# Altium PCB 606-100857-r03.pcbdoc
Units mm, origin at the board's own origin, x right, y up, seen from the top; angles counter-clockwise.
Board outline 10 x 6 mm, 2 copper layers (Top Layer, Bottom Layer), stack 0.771 mm thick; 20 components, 10 nets, 51 pads, 13 vias.
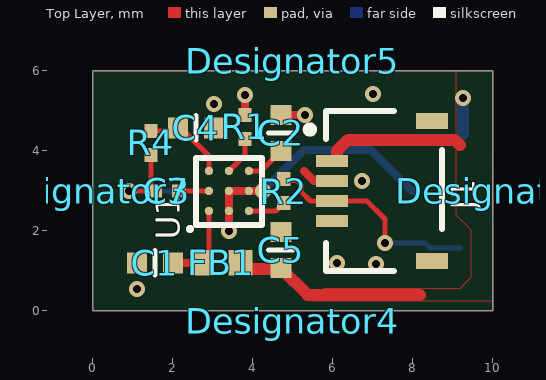
[diagram p0: Top Layer view]
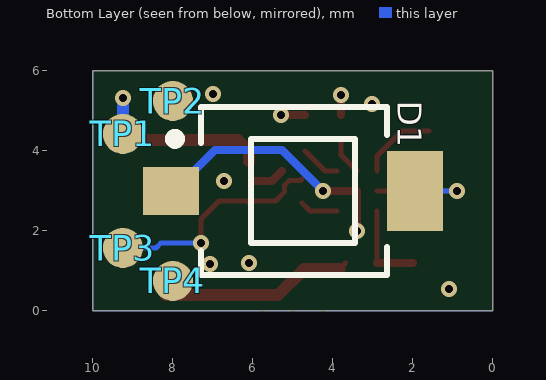
[diagram p1: Bottom Layer view, seen from below]

## Layer stack, top to bottom
Top Solder: solder mask 0.0102, Solder Resist, Dk 3.5
Top Layer: signal copper 0.0356
Dielectric 1: core 0.7, FR-4, Dk 4.2
Bottom Layer: signal copper 0.0356
Bottom Solder: solder mask 0.0102, Solder Resist, Dk 3.5

## Board outline
10,0 10,6 0,6 0,0

## Design rules (kind name [scope] priority, off if disabled: settings)
AssemblyTestPointUsage [All] p0: scope1count=1 scope1_0_kind=Board scope1_0_value=Board scope2count=1 scope2_0_kind=Board scope2_0_value=Board commentlength=0
AssemblyTestpoint [All] p0: scope1count=1 scope1_0_kind=Board scope1_0_value=Board scope2count=1 scope2_0_kind=Board scope2_0_value=Board commentlength=0
BoardOutlineClearance [All] p0: scope1count=1 scope1_0_kind=Board scope1_0_value=Board scope2count=1 scope2_0_kind=Board scope2_0_value=Board commentlength=0 gap=0.25
BoardOutlineClearance BoardOutlineClearance_1 [All] p0: scope1count=1 scope1_0_kind=Component scope1_0_value=j1 scope2count=1 scope2_0_kind=Board scope2_0_value=Board commentlength=0 gap=0
BoardOutlineClearance BoardOutlineClearance_2 [All] p0: scope1count=1 scope1_0_kind=Footprint scope1_0_value=watchman_mousebites scope2count=1 scope2_0_kind=Board scope2_0_value=Board commentlength=0 gap=0
BoardOutlineClearance BoardOutlineClearance_1 [InComponent('j1')] p1: gap=0
BoardOutlineClearance BoardOutlineClearance_2 [HasFootprint('watchman_mousebites')] p2: gap=0
BoardOutlineClearance [All] p3: gap=0.25 except(0: Text-OutlineEdge)
Clearance [All] p0: scope1count=1 scope1_0_kind=Board scope1_0_value=Board scope2count=1 scope2_0_kind=Board scope2_0_value=Board commentlength=0 gap=0.125
Clearance [All] p1: gap=0.125 except(0: SMDPad-Region Region-Region)
ComponentClearance [All] p0: scope1count=1 scope1_0_kind=Board scope1_0_value=Board scope2count=1 scope2_0_kind=Board scope2_0_value=Board commentlength=0 gap=0.18 collisioncheckmode=3
ComponentClearance [All] p1: gap=0.18 collisioncheckmode=3 verticalgap=0.18 showdistances=FALSE
DiffPairsRouting [All] p0: scope1count=1 scope1_0_kind=Board scope1_0_value=Board scope2count=1 scope2_0_kind=Board scope2_0_value=Board commentlength=0
FabricationTestPointUsage [All] p0: scope1count=1 scope1_0_kind=Board scope1_0_value=Board scope2count=1 scope2_0_kind=Board scope2_0_value=Board commentlength=0 valid=0 allowmultiple=FALSE
FabricationTestpoint [All] p0: scope1count=1 scope1_0_kind=Board scope1_0_value=Board scope2count=1 scope2_0_kind=Board scope2_0_value=Board commentlength=0 side=3 testpointundercomponent=TRUE minsize=1.016 maxsize=2.54 preferedsize=1.524 minholesize=0 maxholesize=1.016 preferedholesize=0.813 testpointgrid=0.025
FanoutControl Fanout_BGA [All] p0 off: scope1count=1 scope1_0_kind=Board scope1_0_value=Board scope2count=1 scope2_0_kind=Board scope2_0_value=Board commentlength=69 // Protel DXP Scope 1 Expression Was: IsBGA   Fanout_BGA (Default Rule)
FanoutControl Fanout_LCC [All] p0 off: scope1count=1 scope1_0_kind=Board scope1_0_value=Board scope2count=1 scope2_0_kind=Board scope2_0_value=Board commentlength=69 // Protel DXP Scope 1 Expression Was: IsLCC   Fanout_LCC (Default Rule)
FanoutControl Fanout_SOIC [All] p0 off: scope1count=1 scope1_0_kind=Board scope1_0_value=Board scope2count=1 scope2_0_kind=Board scope2_0_value=Board commentlength=71 // Protel DXP Scope 1 Expression Was: IsSOIC   Fanout_SOIC (Default Rule)
FanoutControl Fanout_Small [All] p0 off: scope1count=1 scope1_0_kind=Board scope1_0_value=Board scope2count=1 scope2_0_kind=Board scope2_0_value=Board commentlength=84 // Protel DXP Scope 1 Expression Was: (CompPinCount < 5)   Fanout_Small (Default Rule)
FanoutControl Fanout_Default [All] p0: scope1count=1 scope1_0_kind=Board scope1_0_value=Board scope2count=1 scope2_0_kind=Board scope2_0_value=Board commentlength=30 // Fanout_Default (Default Rule)
Height [All] p0: scope1count=1 scope1_0_kind=Board scope1_0_value=Board scope2count=1 scope2_0_kind=Board scope2_0_value=Board commentlength=0
HoleSize [All] p0: scope1count=1 scope1_0_kind=Board scope1_0_value=Board scope2count=1 scope2_0_kind=Board scope2_0_value=Board commentlength=0 absolutevalues=TRUE maxlimit=2.7 minlimit=0.025 maxpercent=80.000 minpercent=20.000
HoleSize [All] p1: absolutevalues=TRUE maxlimit=2.7 minlimit=0.025 maxpercent=80.000 minpercent=20.000
HoleToHoleClearance [All] p0: scope1count=1 scope1_0_kind=Board scope1_0_value=Board scope2count=1 scope2_0_kind=Board scope2_0_value=Board commentlength=0
HoleToHoleClearance [All] p1: gap=0.25 allowstackedmicrovias=TRUE
LayerPairs [All] p0: scope1count=1 scope1_0_kind=Board scope1_0_value=Board scope2count=1 scope2_0_kind=Board scope2_0_value=Board commentlength=0 enforce=TRUE
MinimumSolderMaskSliver [All] p0: scope1count=1 scope1_0_kind=Board scope1_0_value=Board scope2count=1 scope2_0_kind=Board scope2_0_value=Board commentlength=0
MinimumSolderMaskSliver MinimumSolderMaskSliver_1 [All] p0 off: scope1count=1 scope1_0_kind=Board scope1_0_value=Board scope2count=1 scope2_0_kind=Board scope2_0_value=Board commentlength=44 // Protel DXP Scope 2 Expression Was: IsPad
MinimumSolderMaskSliver MinimumSolderMaskSliver_1 [isvia vs IsPad] p1: minsoldermaskwidth=0
MinimumSolderMaskSliver [All] p2: minsoldermaskwidth=0.05
NetAntennae [All] p0: scope1count=1 scope1_0_kind=Board scope1_0_value=Board scope2count=1 scope2_0_kind=Board scope2_0_value=Board commentlength=0
PasteMaskExpansion [All] p0: scope1count=1 scope1_0_kind=Board scope1_0_value=Board scope2count=1 scope2_0_kind=Board scope2_0_value=Board commentlength=0 expansion=0
PlaneClearance [All] p0: scope1count=1 scope1_0_kind=Board scope1_0_value=Board scope2count=1 scope2_0_kind=Board scope2_0_value=Board commentlength=0 clearance=0.2
PlaneClearance [All] p1: clearance=0.2
PlaneConnect [All] p0: scope1count=1 scope1_0_kind=Board scope1_0_value=Board scope2count=1 scope2_0_kind=Board scope2_0_value=Board commentlength=0 planeconnectstyle=Direct reliefexpansion=0.508 reliefentries=4 reliefconductorwidth=0.254 reliefairgap=0.254
PlaneConnect [All] p1: planeconnectstyle=Direct reliefexpansion=0.508 reliefentries=4 reliefconductorwidth=0.254 reliefairgap=0.254
PolygonConnect POLY_VIA [All] p0 off: scope1count=1 scope1_0_kind=Board scope1_0_value=Board scope2count=1 scope2_0_kind=Board scope2_0_value=Board commentlength=48 connectstyle=Direct reliefconductorwidth=0.254 reliefentries=4 polygonreliefangle="90 Angle" // Protel DXP Scope 2 Expression Was: IsPolygon
PolygonConnect MTG [All] p0: scope1count=1 scope1_0_kind=Footprint scope1_0_value=MTG197RD102P scope2count=1 scope2_0_kind=Board scope2_0_value=Board commentlength=0 connectstyle=Direct reliefconductorwidth=0.25 reliefentries=4 polygonreliefangle="90 Angle"
PolygonConnect PolygonConnect_1 [All] p0: scope1count=1 scope1_0_kind=Board scope1_0_value=Board scope2count=1 scope2_0_kind=Board scope2_0_value=Board commentlength=0 connectstyle=Relief reliefconductorwidth=0.25 reliefentries=4 polygonreliefangle="90 Angle"
PolygonConnect Photodiode [All] p0: scope1count=1 scope1_0_kind=Footprint scope1_0_value=PHOTODIODE_OSRAM_BPW34S scope2count=1 scope2_0_kind=Board scope2_0_value=Board commentlength=0 connectstyle=NoConnect reliefconductorwidth=0.125 reliefentries=4 polygonreliefangle="90 Angle"
PolygonConnect Photodiode [HasFootprint('PHOTODIODE_OSRAM_BPW34S')] p1: connectstyle=NoConnect reliefconductorwidth=0.125 reliefentries=4 polygonreliefangle="90 Angle" airgapwidth=0.125
PolygonConnect MTG [HasFootprint('MTG197RD102P')] p2: connectstyle=Direct reliefconductorwidth=0.25 reliefentries=4 polygonreliefangle="90 Angle" airgapwidth=0.125
PolygonConnect POLY_VIA [IsVia vs IsPolygon] p3: connectstyle=Direct reliefconductorwidth=0.254 reliefentries=4 polygonreliefangle="90 Angle" airgapwidth=0.254
PolygonConnect PolygonConnect_1 [All] p4: connectstyle=Relief reliefconductorwidth=0.25 reliefentries=4 polygonreliefangle="90 Angle" airgapwidth=0.125
RoomDefinition Sensor [All] p0: scope1count=1 scope1_0_kind=ComponentClass scope1_0_value=Sensor scope2count=1 scope2_0_kind=Board scope2_0_value=Board commentlength=0 region_x1=165063449 region_y1=55641262 region_x2=169000457 region_y2=58003467 confinementstyle=ConfineIn
RoomDefinition Sensor [InComponentClass('Sensor')] p1: confinementstyle=ConfineIn formatcopy=TRUE lockcomponents=FALSE outline 10,0 10,6 0,6 0,0
RoutingCorners [All] p0: scope1count=1 scope1_0_kind=Board scope1_0_value=Board scope2count=1 scope2_0_kind=Board scope2_0_value=Board commentlength=0 cornerstyle=45-Degree minsetback=2.54 maxsetback=2.54
RoutingLayers [All] p0: scope1count=1 scope1_0_kind=Board scope1_0_value=Board scope2count=1 scope2_0_kind=Board scope2_0_value=Board commentlength=0 top layer=Automatic bottom layer=Automatic
RoutingPriority [All] p0: scope1count=1 scope1_0_kind=Board scope1_0_value=Board scope2count=1 scope2_0_kind=Board scope2_0_value=Board commentlength=0
RoutingTopology [All] p0: scope1count=1 scope1_0_kind=Board scope1_0_value=Board scope2count=1 scope2_0_kind=Board scope2_0_value=Board commentlength=0 topology=Shortest
RoutingVias [All] p0: scope1count=1 scope1_0_kind=Board scope1_0_value=Board scope2count=1 scope2_0_kind=Board scope2_0_value=Board commentlength=0 holewidth=0.2 width=0.4 viastyle="Through Hole" minholewidth=0.1 minwidth=0.3 maxholewidth=0.25 maxwidth=0.5
RoutingVias [All] p1: holewidth=0.2 width=0.4 viastyle="Through Hole" minholewidth=0.1 minwidth=0.3 maxholewidth=0.25 maxwidth=0.5
ShortCircuit [All] p0: scope1count=1 scope1_0_kind=Board scope1_0_value=Board scope2count=1 scope2_0_kind=Board scope2_0_value=Board commentlength=0 allowed=FALSE
SilkToBoardRegionClearance [All] p0: scope1count=1 scope1_0_kind=Board scope1_0_value=Board scope2count=1 scope2_0_kind=Board scope2_0_value=Board commentlength=0
SilkToSilkClearance [All] p0 off: scope1count=1 scope1_0_kind=Board scope1_0_value=Board scope2count=1 scope2_0_kind=Board scope2_0_value=Board commentlength=0
SilkToSilkClearance [All] p1 off: silktosilkclearance=0.05
SilkToSolderMaskClearance [All] p0 off: scope1count=1 scope1_0_kind=Board scope1_0_value=Board scope2count=1 scope2_0_kind=Board scope2_0_value=Board commentlength=44 // Protel DXP Scope 1 Expression Was: IsPad
SilkToSolderMaskClearance [IsPad] p1: minsilkscreentomaskgap=0.125 clearancetoexposedcopper=TRUE
SolderMaskExpansion [All] p0: scope1count=1 scope1_0_kind=Board scope1_0_value=Board scope2count=1 scope2_0_kind=Board scope2_0_value=Board commentlength=0 expansion=0.05
SolderMaskExpansion [All] p1: expansion=0.05
UnRoutedNet [All] p0: scope1count=1 scope1_0_kind=Board scope1_0_value=Board scope2count=1 scope2_0_kind=Board scope2_0_value=Board commentlength=0
UnpouredPolygon [All] p0: scope1count=1 scope1_0_kind=Board scope1_0_value=Board scope2count=1 scope2_0_kind=Board scope2_0_value=Board commentlength=0
Width [All] p0: scope1count=1 scope1_0_kind=Board scope1_0_value=Board scope2count=1 scope2_0_kind=Board scope2_0_value=Board commentlength=0 maxlimit=0.5 minlimit=0.125 preferedwidth=0.125
Width PWR_GND [All] p0: scope1count=1 scope1_0_kind=NetClass scope1_0_value=PWR_GND scope2count=1 scope2_0_kind=Board scope2_0_value=Board commentlength=0 maxlimit=0.25 minlimit=0.25 preferedwidth=0.25
Width CRITICAL [All] p0: scope1count=1 scope1_0_kind=NetClass scope1_0_value=MOTOR_DRIVERS scope2count=1 scope2_0_kind=Board scope2_0_value=Board commentlength=0 maxlimit=0.4 minlimit=0.3 preferedwidth=0.4
Width PWR_GND [InNetClass('PWR_GND')] p1: maxlimit=0.25 minlimit=0.25 preferedwidth=0.25
Width CRITICAL [InNetClass('MOTOR_DRIVERS')] p2: maxlimit=0.4 minlimit=0.3 preferedwidth=0.4
Width [All] p3: maxlimit=0.5 minlimit=0.125 preferedwidth=0.125
22 further rules are at their usual default settings.

## Classes and differential pairs
component class Sensor: C1 C2 C3 C4 C5 D1 FB1 J1 R1 R2 R4 TP1 TP2 TP3 TP4 U1

## Components (designator, comment, footprint, x,y, rotation, side; value= is the part's Value field where it differs from the comment)
C1 "0.1uF" 0402-IPCsm_55 1.55,1.2 r180 top
C2 "0.1uF" 0402-IPCsm_55 4.7,4.45 r90 top
C3 "33pF" 0201-IPCsm_33 1.85,3 r0 top
C4 "0.1uF" 0402-IPCsm_55 2.575,4.575 r0 top
C5 "1uF" 0402-IPCsm_55 4.7,1.525 r90 top
D1 "BPW 34 S" PHOTODIODE_OSRAM_BPW34S 4.95,3 r180 bottom
Designator4 "Comment" Watchman_Mousebites 5,0 r0 top
Designator5 "Comment" Watchman_Mousebites 5,6 r180 top
Designator6 "Comment" Watchman_Mousebites 10,3 r90 top
Designator7 "Comment" Watchman_Mousebites 0,3 r270 top
FB1 "BK1005HM102-T" ind-0402_55 3.205,1.2 r180 top
J1 "FH34S-4S-0.5SH" con_hirose_FH34SRJ-4S 8.725,3 r270 top
R1 "15.0K" 0201-IPCsm_26 3.8,4.6 r90 top
R2 "33" 0201-IPCsm_26 4.77,2.995 r90 top
R4 "2.70K" 0201-IPCsm_26 1.45,4.2 r90 top
TP1 "tp-1mm" TP-S100_SMT 9.25,4.425 r180 bottom locked
TP2 "tp-1mm" TP-S100_SMT 8,5.25 r180 bottom locked
TP3 "tp-1mm" TP-S100_SMT 9.25,1.575 r180 bottom locked
TP4 "tp-1mm" TP-S100_SMT 8,0.75 r180 bottom locked
U1 "TS3633" BGA9_166X166X61_50p 3.4,3 r90 top

## Footprints (in the part's own frame and the unit in brackets; to place one, negate y for a bottom-side part, rotate by r counter-clockwise, add the part's x,y. Pads: shape width x height; smd on the part's side, far side on the other; paste and mask are expansions set on the pad)
0201-IPCsm_26 [mm] "0201-IPCSM_26"
  rect 0.35x0.33 smd mask+0: 1(-0.3,0) 2(0.3,0)
0201-IPCsm_33 [mm] "0201-IPCSM_33"
  rect 0.35x0.33 smd mask+0: 1(-0.3,0) 2(0.3,0)
0402-IPCsm_55 [mm] "0402-IPCSM_55"
  rect 0.5x0.52 smd mask+0: 1(-0.45,0) 2(0.45,0)
  silkscreen extent 0,-0.3 0,0.3
BGA9_166X166X61_50p [mm]
  round 0.21 smd: A1(-0.5,0.5) A2(0,0.5) A3(0.5,0.5) B1(-0.5,0) B2(0,0) B3(0.5,0) C1(-0.5,-0.5) C2(0,-0.5) C3(0.5,-0.5)
  silkscreen extent -1,-0.82 0.82,1.02
con_hirose_FH34SRJ-4S [mm] "CON_HIROSE_FH34SRJ-4S"
  rect 0.3x0.8 smd mask+0: 1(-0.75,-2.75) 2(-0.25,-2.75) 3(0.25,-2.75) 4(0.75,-2.75)
  rect 0.4x0.8 smd mask+0: 5(-1.75,-0.25) 6(1.75,-0.25)
  silkscreen extent -2,-3.39 2,0
ind-0402_55 [mm] "Chip Inductor, 2-Leads, Body 1.00x0.50mm, IPC Medium Density"
  rect 0.6x0.64 smd: 1(-0.48,0) 2(0.48,0)
PHOTODIODE_OSRAM_BPW34S [mm] "2-Leads, Body 3.85x4.40mm"
  rect 1.4x1.2 smd mask+0: 1(-3.1,0)
  rect 1.4x2 smd mask+0: 2(3,0)
  silkscreen extent -3.13,-2.1 2.3,2.1
TP-S100_SMT [mm] "TP-S100_SMT"
  round 1 smd paste-0.5: 1(0,0)
Watchman_Mousebites [mm] "Mousebites, Single"
  round 0 hole 0.5 unplated mask+0: 1(-0.75,-0.25) 1(0,-0.25) 1(0.75,-0.25)

## Part data
C1 C2 C4: library part TMK105BJ104KV-F, "CAP CER .10UF 25V X5R 0402"
C3: library part C0603C0G1H330J030BA, "CAP CER 33PF 50V 5% NP0 0201"
C5: library part GRM155R61A105KE15D, "CAP CER 1UF 10V 10% X5R 0402"
D1: "PHOTODIODE PIN HI SPEED HI SENS"
FB1: "FERRITE BEAD 1000 OHM 0402"
J1: "CONN FFC FPC 4POS 0.50MM R/A"
R1: library part ERJ-1GEF1502C, "RES 15.0K OHM 1/20W 1% 0201 SMD"
R2: library part RC0201FR-0733R, "RES 33 OHM 1/20W 1% 0201 SMD"
R4: library part ERJ-1GEF2701C, "RES 2.70K OHM 1/20W 1% 0201 SMD"
TP1 TP2 TP3 TP4: library part TP0042, "TESTPOINT, 1MM SMD, Square pad, Round SM opening"
U1: "Optical Receiver for VR Gaming System"

## Via types
v1: diameter 0.4, hole 0.2, Top Layer to Bottom Layer, tented both sides, 13 vias

## Nets (pads, with @x,y where several pads share a name; then routed paths per layer and width w, separated by ;. In a path a pad name is that pad's centre, name@x,y a point inside that pad or via, vN(x,y) a via of type N, cw(c..) or ccw(c..) an arc to the next point about the centre after c; other vN are vias at no path point)
3V3: C5.1 FB1.1 J1.1 TP1.1 | length 9.2
  Top Layer w0.125: FB1.1 FB1.1@3.841,1.044
  Top Layer w0.3: FB1.1@3.841,1.044 4.724,1.044 5.367,0.4 8.181,0.4 ; J1.1@6.1,3.75 6.1,4 6.375,4.275 9.025,4.275 ; 9.05,4.275 9.175,4.15
  Bottom Layer w0.3: TP1.1 v1(9.25,5.325)
AVDD: C1.1 FB1.2 U1.A1 | length 2.2
  Top Layer w0.127: FB1.2@2.9,1.2 U1.A1
  Top Layer w0.2: C1.1 FB1.2 FB1.2@2.9,1.2
DC_DET: C4.1 R4.2 U1.A3 | length 1.9
  Top Layer w0.127: R4.2@1.6,4.5 2.275,4.5 2.9,3.875 U1.A3
DVDD: C2.1 U1.C3 | length 1
  Top Layer w0.127: U1.C3 4.2,3.5 C2.1
ENVLP: R2.1 U1.C1 | length 1
  Top Layer w0.125: 4.1,2.5 4.575,2.5 R2.1
  Top Layer w0.127: U1.C1 4.1,2.5
ENVLP_OUT: J1.3 R2.2 TP3.1 | length 5.6
  Top Layer w0.125: R2.2 4.807,3.257 5.093,3.257 5.205,3.145 5.205,2.982 5.437,2.75 J1.3
  Top Layer w0.127: J1.3@6.1,2.7 6.05,2.75 6.847,2.75 7.3,2.297 v1(7.3,1.694)
  Bottom Layer w0.127: v1(7.3,1.694) 8.306,1.694 8.425,1.575 TP3.1@9.175,1.575
GND: C1.2 C2.2 C4.2 C5.2 D1.1 J1.2 J1.4 J1.5 J1.6 R1.2 TP2.1 TP4.1 U1.B1 U1.B2 U1.C2 | length 8.3
  Top Layer w0.2: v1(3.4,2) U1.B1 U1.B2 U1.C2 v1(4.25,3) ; R1.2 v1(3.8,5.4) ; C2.2 v1(5.3,4.9) ; 5.275,3.5 5.525,3.25 J1.2
  Bottom Layer w0.2: v1@4.346,3.095 5.275,4.025 6.95,4.025 7.975,3 D1.1
  other v1: 1.1,0.55 7.075,1.175 6.1,1.2 6.725,3.25 3.025,5.175 7,5.425
IIN: C3.2 U1.A2 | length 0.7
  Top Layer w0.127: C3.2 U1.A2
IR_C: C3.1 D1.2 R4.1 | length 2.6
  Top Layer w0.127: v1(0.9,3) C3.1@1.45,3 ; R4.1 C3.1@1.45,3 ; C3.1 C3.1@1.45,3
  Bottom Layer w0.127: v1(0.9,3) 1.9,3 1.925,2.975 D1.2
RBIAS: R1.1 U1.B3 | length 1
  Top Layer w0.127: U1.B3 3.8,3.9 R1.1
pads on no net: Designator4.1 Designator5.1 Designator6.1 Designator7.1

## Polygon pours and split planes (outlines as drawn)
no net on FAB_DWG (solid): 1029 vertices, not listed, extent 250.397,-63.029 391.443,-49.455
no net on FAB_DWG (solid): 89 vertices, not listed, extent 290.617,-53.221 297.036,-49.457
no net on FAB_DWG (solid): 74 vertices, not listed, extent 302.287,-56.192 309.679,-49.457
no net on FAB_DWG (solid): 83 vertices, not listed, extent 316.068,-54.957 320.974,-50.369
no net on FAB_DWG (solid, pour order 0): 82 vertices, not listed, extent 327.681,-53.602 334.026,-50.374
no net on ASY_DWG (solid): 1029 vertices, not listed, extent 250.397,-63.029 391.443,-49.455
no net on ASY_DWG (solid): 89 vertices, not listed, extent 290.617,-53.221 297.036,-49.457
no net on ASY_DWG (solid): 74 vertices, not listed, extent 302.287,-56.192 309.679,-49.457
no net on ASY_DWG (solid): 83 vertices, not listed, extent 316.068,-54.957 320.974,-50.369
no net on ASY_DWG (solid): 82 vertices, not listed, extent 327.681,-53.602 334.026,-50.374
no net on ASY_DWG_R (solid): 1029 vertices, not listed, extent -379.557,-63.029 -238.511,-49.455
no net on ASY_DWG_R (solid): 89 vertices, not listed, extent -285.15,-53.221 -278.731,-49.457
no net on ASY_DWG_R (solid): 74 vertices, not listed, extent -297.793,-56.192 -290.4,-49.457
no net on ASY_DWG_R (solid): 83 vertices, not listed, extent -309.088,-54.957 -304.182,-50.369
no net on ASY_DWG_R (solid): 82 vertices, not listed, extent -322.14,-53.602 -315.795,-50.374
no net on TITLEBLOCK (solid): 331 vertices, not listed, extent -57.582,-36.029 1.123,-29.409
no net on TITLEBLOCK (solid): -35.645,-29.629 -33.107,-31.947 -33.107,-29.629 -35.645,-29.629
no net on TITLEBLOCK (solid): -40.832,-29.629 -39.709,-30.838 -38.63,-29.629 -40.832,-29.629
no net on TITLEBLOCK (solid): -30.347,-31.529 -29.357,-29.729 -28.457,-31.529 -30.347,-31.529
no net on TITLEBLOCK (solid): 26 vertices, not listed, extent -25.507,-30.929 -22.807,-29.629
GND on Bottom Layer "GND_BOTTOM" (solid, pour order 4): 0,0 0,6 10,6 10,0
GND on Top Layer "GND" (solid, remove dead copper, pour order 5): 0,0 0,6 10,6 10,0
3V3 on Top Layer "3V3-Poly" (solid, pour order 2): 10,6 9.075,6 9.075,2.4 9.45,2.025 9.45,0.825 9.175,0.55 5.775,0.55 5.475,0.25 10,0.25

## Other copper
Top Layer:
  text "'.Layer_Name'" at -31.752,-54.13 h2.54
Bottom Layer:
  text "'.Layer_Name'" at -31.825,-53.925 h2.54

## Silkscreen, mask and mechanical layers (free items; w line width, h text height)
Top Overlay:
  text "'.Layer_Name'" at -29.8,-54.3 h2.54
Bottom Overlay:
  text "'.Layer_Name'" at -33.45,-54.175 h2.54
Top Paste:
  text "'.Layer_Name'" at -31.752,-54.13 h2.54
Bottom Paste:
  text "'.Layer_Name'" at -31.575,-54.425 h2.54
Top Solder:
  the board outline again, w0.2
  text "'.Layer_Name'" at -29.675,-54.05 h2.54
Bottom Solder:
  the board outline again, w0.2
  text "'.Layer_Name'" at -33.075,-54.3 h2.54
Drill Guide:
  text ".Layer_Name" at -7.346,-9.825 h3.81
Outline:
  the board outline again, w0.05
FAB_DWG:
  drawing of 224 lines, arcs and shapes, not listed
  text "1" at 334.279,394.959 h7.62
  text "6" at -217.053,394.781 h7.62
  text "5" at -106.461,394.705 h7.62
  text "7" at -326.984,394.654 h7.62
  text "4" at 3.14,394.553 h7.62
  text "3" at 113.909,394.553 h7.62
  text "2" at 223.942,394.553 h7.62
  text "REVISIONS" at 288.299,385.971 h2.54
  text "REV" at 206.007,378.971 h2.03
  text "DESCRIPTION" at 260.511,378.971 h2.03
  text "DATE" at 352.195,378.971 h2.03
  text "APRVD" at 377.383,378.971 h2.03
  text "NOTES: UNLESS OTHERWISE SPECIFIED" at -349.904,373.156 h2.03
  text "01" at 206.411,370.971 h2.54
  text "INITIAL RELEASE" at 217.443,370.971 h2.54
  text "07/08/2016" at 346.283,370.971 h2.54
  text "1   DIMENSIONS AND VALUES ARE METRIC." at -353.654,365.156 h2.03
  text "PANEL ROUTE REDEFINED, DOCUMENTATION CHANGES." at 218,364 h2.54
  text "02" at 206.411,363.971 h2.54
  text "07/27/2016" at 346.283,363.971 h2.54
  text "2   FABRICATION OF PRINTED CIRCUIT BOARD SHALL BE IN ACCORDANCE WITH" at -353.654,359.156 h2.03
  text "09/07/2016" at 346.2,357.35 h2.54
  text "REPOSITION C5 AND R2" at 217.825,357.05 h2.54
  text "03" at 206.236,357.021 h2.54
  text "IPC-6011 AND IPC-6012, CLASS 2, AND THE DESIGN INTENT OF IPC-2221 AND" at -353.654,355.156 h2.03
  text "IPC-2222,CLASS 2, AND SHALL MEET THE ACCEPTABILITY REQUIREMENTS OF" at -353.654,351.156 h2.03
  text "IPC-A-600. PRODUCE PCB USING GERBER OR ODB++ FILES PROVIDED." at -353.654,347.156 h2.03
  text "3   FABRICATION VENDOR MUST BE UL APPROVED AND BOARD SHALL BE MARKED WITH" at -353.654,341.156 h2.03
  text "A UL REGISTERED LOGO. MATERIAL MUST MEET UL 94V-0 FLAMMABILITY RATING." at -353.7,337.4 h2.03
  text "4   MATERIAL REQUIREMENTS: MANUFACTURER SHALL SELECT MATERIALS TO ACHIEVE A" at -353.654,331.156 h2.03
  text "BALANCED CONSTRUCTION WITH THE OPTION OF MODIFYING DIELECTRIC THICKNESS" at -353.654,327.156 h2.03
  text "D" at 396.128,325.287 h7.62
  text "D" at -388.554,325.135 h7.62
  text "TO MEET THE REQUIREMENTS SPECIFIED HEREIN." at -353.654,323.156 h2.03
  text "5   BASE MATERIALS: GLASS EPOXY FR4 OR EQUIVALENT PER IPC-4101 MEETING RoHS" at -353.654,317.156 h2.03
  text "REQUIREMENTS FOR PCB FABRICATION AND ASSEMBLY, NOT LESS THAN TG150," at -353.654,313.156 h2.03
  text "A  SEE LAYER DETAIL FOR LAYER STACK UP, ESTIMATED DIELECTRIC THICKNESS," at -353.654,309.156 h2.03
  text "AND COPPER WEIGHT." at -353.654,305.156 h2.03
  text "B  MANUFACTURER SHALL SUBMIT A PROPOSED STACK UP FOR SYNAPSE APPROVAL" at -353.654,301.156 h2.03
  text "IF MODIFICATION IS REQUIRED." at -353.654,297.156 h2.03
  text "C  NO MATERIAL SUBSTITUTIONS WILL BE ALLOWED WITHOUT SYNAPSE APPROVAL." at -353.654,293.156 h2.03
  text "6   PROCESSING ALLOWANCE:" at -353.654,287.156 h2.03
  text "A  LAYER REGISTRATION FROM PRIMARY SIDE TO SECONDARY SIDE SHALL NOT" at -353.654,283.156 h2.03
  text "EXCEED 0.13mm TOTAL." at -353.654,279.156 h2.03
  text "B  MAXIMUM BOW AND TWIST SHALL BE .75% PER IPC-TM-650." at -353.654,275.156 h2.03
  text "7  VIAS WITH A FINISHED HOLE SIZE OF 0.25mm OR SMALLER DO NOT REQUIRE" at -353.654,269.681 h2.03
  text "A MINIMUM HOLE SIZE AND MAY BE PLATED SHUT OR FILLED WITH SOLDER" at -353.654,265.681 h2.03
  text "MASK. MINIMUM SOLDER PLATING MUST BE MAINTAINED." at -353.654,261.681 h2.03
  text "8   CONDUCTORS:  COPPER FOIL SHALL BE IN ACCORDANCE WITH IPC-4562/0." at -353.704,257.381 h2.03
  text "A  FINISH. COPPER PLATE THICKNESS ON SURFACE COPPER AND PLATED" at -353.704,253.381 h2.03
  text "THROUGH HOLES TO BE 0.025mm MINIMUM." at -353.704,249.381 h2.03
  text "B  MINIMUM FINISH CONDUCTOR WIDTH IS 0.076mm" at -353.704,245.381 h2.03
  text "C  MINIMUM FINISHED CONDUCTOR SPACING (AIR GAP) INCLUDING PADS, VIAS," at -353.704,241.381 h2.03
  text "SHAPES, ETC. IS 0.076mm." at -353.704,237.381 h2.03
  text "9   FINAL FINISH SHALL BE ELECTROLESS NICKEL / IMMERSION GOLD (ENIG)." at -353.704,231.381 h2.03
  text "FINISH THICKNESS SHALL BE 3 TO 6 um [118 TO 236 MICROINCHES] OF NICKEL" at -353.704,227.381 h2.03
  text "AND 0.04 TO 0.125um [1.5 TO 5 MICROINCHES] OF GOLD." at -353.704,223.381 h2.03
  text "FINISH SHALL BE RoHS COMPLIANT AND MEET REQUIREMENTS OF IPC-4552." at -353.704,219.381 h2.03
  text "10  FILLETING IS NOT PERMITTED WITHOUT PRIOR SYNAPSE APPROVAL." at -353.704,213.381 h2.03
  text "11  SOLDER MASK AND COATING:  APPLY SOLDER MASK TO PRIMARY AND SECONDARY" at -353.704,207.381 h2.03
  text "SIDES OF PRINTED WIRING BOARD USING SUPPLIED GERBER FILES IN ACCORDANCE" at -353.704,203.381 h2.03
  text "C" at 396.128,199.836 h7.62
  text "C" at -388.681,199.633 h7.62
  text "WITH IPC-SM-840, THICKNESS BETWEEN 0.02 - 0.04mm, COLOR GREEN LIQUID" at -353.704,199.381 h2.03
  text "PHOTO-IMAGEABLE, CLASS 2." at -353.704,195.381 h2.03
  text "12  OVERALL BOARD THICKNESS SHALL BE MEASURED OVER FINAL FINISH INCLUDING" at -353.704,189.381 h2.03
  text "SOLDER MASK." at -353.704,185.381 h2.03
  text "13  SILKSCREEN:  APPLY SILKSCREEN (LEGEND) TO PRIMARY AND SECONDARY SIDES" at -353.704,179.381 h2.03
  text "OF PRINTED CIRCUIT BOARD. USE PERMANENT INK, NON-NUTRIENT, NON-" at -353.704,175.381 h2.03
  text "CONDUCTIVE POLYMER, COLOR WHITE, PER IPC-4781, TYPE 2. RELIEVE LEGEND" at -353.704,171.381 h2.03
  text "FROM ALL EXPOSED LANDS AND HOLES AS REQUIRED." at -353.704,167.381 h2.03
  text "14  ANY ALTERATIONS TO THE PROVIDED GERBER ARTWORK FILES MUST BE SUBMITTED" at -353.704,161.381 h2.03
  text "TO SYNAPSE FOR APPROVAL." at -353.704,157.381 h2.03
  text "15  MARK MANUFACTURER NAME, INITIALS, OR LOGO, LOT NUMBER, DATE CODE," at -353.329,152.831 h2.03
  text "UL RECOGNITION MARK AND FLAME RATING IN ETCH OR SILKSCREEN." at -353.329,148.831 h2.03
  text "16  PANELIZATION: COORDINATE WITH SYNAPSE OR THE SYNAPSE SPECIFIED" at -353.329,143.081 h2.03
  text "ASSEMBLY VENDOR FOR PANEL SIZE AND CONFIGURATION. IF BOARDS ARE" at -353.329,139.081 h2.03
  text "NOT TO BE COMPLETELY ROUTED OUT, TRIM PANELIZATION TABS TO LESS" at -353.329,135.081 h2.03
  text "THAN 0.1mm UPON DE-PANELIZATION. PLACE PANELIZATION TABS IN AREAS" at -353.329,131.081 h2.03
  text "INDICATED ON THIS DRAWING." at -353.329,127.081 h2.03
  text "17  BOARD MUST BE ELECTRICALLY TESTED USING SUPPLIED IPC-356 NETLIST." at -353.329,122.081 h2.03
  text "18 PANEL NOT TO BE SINGULARIZED BELOW 80 UP, 174.219 x 101.854 MM." at -353.329,117.081 h2.03
  text "B" at -388.452,74.233 h7.62
  text "B" at 396.255,74.233 h7.62
  text "PRIMARY SIDE" at -292.5,49 h2.03
  text "SILKSCREEN" at -262.777,43.81 h2.03
  text "SOLDERMASK" at -263.183,40.357 h2.03
  text "0.79 +/-0.079" at -363.985,32.673 h2.03
  text "1/2 OZ CU" at -318.861,32.007 h2.03
  text "LAYER 1 (SIGNAL)" at -263.741,31.173 h2.03
  text "FINISHED" at -360.737,27.673 h2.03
  text "DIELECTRIC" at -318.981,27.173 h2.03
  text "1/2 OZ CU" at -318.861,23.007 h2.03
  text "THICKNESS" at -362.049,22.673 h2.03
  text "LAYER 2 (SENSOR)" at -263.741,22.673 h2.03
  text "SOLDERMASK" at -263.295,15.519 h2.03
  text "SILKSCREEN" at -262.758,11.484 h2.03
  text "SECONDARY SIDE" at -294.5,7 h2.03
  text "DIMENSIONS ARE FOR REFERENCE ONLY," at -25.525,-19.6 h2.29
  text "LAYER DETAIL" at -307.625,-21.322 h5.08
  text "USE BOARD OUTLINE FOR DIMENSIONAL DATA." at -30.4,-23.95 h2.29
  text "SCALE:NONE" at -292.861,-28.327 h2.03
  text "CAP CONSTRUCTION SHOWN (PREFERRED)" at -310.349,-36.522 h2.03
  text "CORE CONSTRUCTION ACCEPTABLE" at -305.477,-41.327 h2.03
  text "A" at 396.001,-51.522 h7.62
  text "A" at -388.706,-51.649 h7.62
  text "APPROVALS" at 188.135,-55.029 h2.03
  text "DATE" at 231.195,-55.029 h2.03
  text "UNLESS OTHERWISE" at 132.187,-57.029 h2.54
  text "DESIGNER" at 171.443,-61.029 h2.03
  text "SPECIFIED" at 139.299,-62.029 h2.54
  text "DIMENSIONS ARE" at 134.219,-67.029 h2.54
  text "F. PRICE" at 175.443,-67.029 h2.54
  text "09/07/2016" at 225.283,-67.029 h2.54
  text "1511 Sixth Ave. Suite 300, Seattle, WA 98101 206.381.0898" at 262.531,-68.029 h2.54
  text "IN MILLIMETERS" at 134.219,-72.029 h2.54
  text "ENGINEER" at 171.443,-74.029 h2.03
  text "PRINTED CIRCUIT BOARD" at 288.939,-76.529 h3.81
  text "PROPRIETARY" at 83.679,-77.029 h3.81
  text "D. BRUEY /  N. WILDING" at 175.443,-80.029 h2.54
  text "TOLERANCES:" at 138.267,-82.029 h2.54
  text "AND" at 95.871,-83.029 h3.81
  text ".Board_Name" at 286.125,-84.725 h5.08
  text "MECH ENG" at 171.443,-87.029 h2.03
  text ".XX" at 136.947,-89.029 h2.29
  text "0.25" at 150.443,-89.029 h2.29
  text "CONFIDENTIAL" at 82.155,-89.529 h3.81
  text "SIZE" at 254.595,-91.029 h1.78
  text "DWG NO" at 265.443,-91.029 h1.78
  text "REV" at 373.307,-91.029 h1.78
  text "R. NICOLI" at 175.443,-93.029 h2.54
  text "THE INFORMATION CONTAINED IN" at 84.169,-93.779 h1.52
  text ".XXX" at 135.115,-96.029 h2.29
  text "0.127" at 150.443,-96.029 h2.29
  text "THIS DRAWING IS PROPRIETARY AND" at 82.345,-96.529 h1.52
  text "RESTRICTED. ANY REPRODUCTION" at 84.169,-99.279 h1.52
  text "601-" at 282.498,-100.73 h7.62
  text ".Board_Number" at 310.898,-100.83 h7.62
  text "D" at 254.395,-101.029 h7.62
  text ".PCB_Revision" at 368.839,-101.537 h7.62
  text "IN PART OR WHOLE WITHOUT THE" at 84.169,-102.029 h1.52
  text "ANGLES" at 137.451,-103.029 h2.29
  text "5" at 156.443,-103.029 h2.29
  text "EXPRESS WRITTEN PERMISSION" at 85.135,-104.779 h1.52
  text "OF THE OWNER IS PROHIBITED" at 85.135,-107.529 h1.52
  text "SCALE:NONE" at 255.323,-108.029 h1.78
  text "SHEET 1 OF 1" at 366.899,-108.029 h1.78
  text "1" at 334.483,-120.077 h7.62
  text "6" at -216.977,-120.229 h7.62
  text "5" at -106.538,-120.229 h7.62
  text "4" at 2.911,-120.508 h7.62
  text "3" at 113.731,-120.534 h7.62
  text "2" at 224.17,-120.534 h7.62
  text "7" at -327.086,-121.093 h7.62
ASY_DWG:
  circle w0.38: c160.186,-100.481 r0.829
  lines w0.3: 170.443,-110.029 170.443,-50.029 ; 170.443,-96.029 250.443,-96.029 ; 170.443,-83.029 250.443,-83.029 ; 170.443,-70.029 250.443,-70.029 391.443,-70.029 ; 170.443,-57.029 250.443,-57.029 ; 201.268,355.021 391.268,355.021 ; 201.443,361.971 391.443,361.971 ; 201.768,369.063 201.443,368.971 391.443,368.971 ; 201.768,384.063 201.443,383.971 391.443,383.971 ; 215.443,354.971 215.443,383.971 ; 220.443,-110.029 220.443,-50.029 ; 250.443,-110.029 250.443,-50.029 ; 250.443,-104.029 391.443,-104.029 ; 250.443,-88.029 390.443,-88.029 ; 263.443,-104.029 263.443,-88.029 ; 340.443,354.971 340.443,383.971 ; 359.443,-104.029 359.443,-88.029 ; 371.443,354.971 371.443,383.971
  lines w0.38: 145.443,-96.029 147.443,-96.029 ; 145.443,-94.029 147.443,-94.029 ; 145.443,-89.029 147.443,-89.029 ; 145.443,-87.029 147.443,-87.029 ; 146.443,-95.029 146.443,-93.029 ; 146.443,-88.029 146.443,-86.029 ; 151.443,-103.029 153.443,-103.029 ; 151.443,-101.029 153.443,-101.029 ; 152.443,-102.029 152.443,-100.029
  lines w0.508: 171.465,391.175 171.465,404.129 ; 171.465,391.175 171.465,404.129 ; 171.465,391.175 171.465,404.129 ; -399.146,14.62 -379.842,14.62 -399.146,14.62 ; -399.146,15.077 -379.842,15.077 -399.146,15.077 ; -399.146,140.019 -379.842,140.019 -399.146,140.019 ; -399.146,140.477 -379.842,140.477 -399.146,140.477 ; -399.146,265.419 -379.842,265.419 -399.146,265.419 ; -399.146,265.876 -379.842,265.876 -399.146,265.876 ; -269.91,-123.48 -269.91,-110.526 -269.91,-123.48 ; -269.91,391.175 -269.91,404.129 -269.91,391.175 ; -269.453,-123.48 -269.453,-110.526 -269.453,-123.48 ; -269.453,391.175 -269.453,404.129 -269.453,391.175 ; -159.7,-123.48 -159.7,-110.526 -159.7,-123.48 ; -159.7,391.175 -159.7,404.129 -159.7,391.175 ; -159.243,-123.48 -159.243,-110.526 -159.243,-123.48 ; -159.243,391.175 -159.243,404.129 -159.243,391.175 ; -49.464,-123.48 -49.464,-110.526 -49.464,-123.48 ; -49.464,391.175 -49.464,404.129 -49.464,391.175 ; -49.007,-123.48 -49.007,-110.526 -49.007,-123.48 ; -49.007,391.175 -49.007,404.129 -49.007,391.175 ; 60.798,391.175 60.798,404.129 60.798,391.175 ; 61.255,391.175 61.255,404.129 61.255,391.175 ; 171.008,391.175 171.008,404.129 171.008,391.175 ; 281.219,391.429 281.219,404.129 281.219,391.429 ; 281.244,-123.48 281.244,-110.526 281.244,-123.48 ; 281.676,391.175 281.676,404.129 281.676,391.175 ; 281.701,-123.48 281.701,-110.526 281.701,-123.48 ; 391.683,14.62 410.987,14.62 391.683,14.62 ; 391.683,15.077 410.987,15.077 391.683,15.077 ; 391.683,140.045 410.987,140.045 391.683,140.045 ; 391.683,140.502 410.987,140.502 391.683,140.502 ; 391.683,265.47 410.987,265.47 391.683,265.47 ; 391.683,265.927 410.987,265.927 391.683,265.927
  lines w1: -379.557,-110.029 391.443,-110.029 391.443,390.971 -379.557,390.971 -379.557,-110.029
  lines w1.1: 61.443,-123.029 61.443,-110.029 ; 75.443,-110.029 75.443,-70.029 126.443,-70.029 ; 126.443,-110.029 126.443,-70.029 ; 170.443,-123.029 170.443,-110.029 ; 201.443,354.971 201.443,390.971 ; 201.443,375.971 391.443,375.971 ; 250.443,-50.029 126.443,-50.029 126.443,-70.029
  text "1" at 334.279,394.959 h7.62
  text "6" at -217.053,394.781 h7.62
  text "5" at -106.461,394.705 h7.62
  text "7" at -326.984,394.654 h7.62
  text "4" at 3.14,394.553 h7.62
  text "3" at 113.909,394.553 h7.62
  text "2" at 223.942,394.553 h7.62
  text "REVISIONS" at 288.299,385.971 h2.54
  text "REV" at 206.007,378.971 h2.03
  text "DESCRIPTION" at 260.511,378.971 h2.03
  text "DATE" at 352.195,378.971 h2.03
  text "APRVD" at 377.383,378.971 h2.03
  text "NOTES: UNLESS OTHERWISE SPECIFIED" at -367.432,378.871 h2.03
  text "1   RoHS COMPLIANT ASSEMBLY REQUIRED. ASSEMBLE PER IPC-A-610, CLASS 2," at -367.332,372.371 h2.03
  text "01" at 206.411,370.971 h2.54
  text "INITIAL RELEASE" at 217.443,370.971 h2.54
  text "07/08/2016" at 346.283,370.971 h2.54
  text "2   AQUEOUS BASED CLEANING AFTER SOLDER FOR ALL COMPONENTS IS PREFERRED, NO-CLEAN" at -367.238,367.166 h2.03
  text "PANEL ROUTE REDEFINED, DOCUMENTATION CHANGES." at 218,364 h2.54
  text "02" at 206.411,363.971 h2.54
  text "07/27/2016" at 346.283,363.971 h2.54
  text "RoHS SOLDER PROCESS IS ACCEPTABLE." at -367.382,363.021 h2.03
  text "09/07/2016" at 346.2,357.4 h2.54
  text "3   ITEM IDENTIFICATION: MARK REVISION NUMBER OF THIS DRAWING IN THE SPACE PROVIDED." at -367.557,357.221 h2.03
  text "REPOSITION C5 AND R2" at 217.825,357.05 h2.54
  text "03" at 206.236,357.021 h2.54
  text "D" at 396.128,325.287 h7.62
  text "D" at -388.554,325.135 h7.62
  text "C" at 396.128,199.836 h7.62
  text "C" at -388.681,199.633 h7.62
  text "B" at -388.452,74.233 h7.62
  text "B" at 396.255,74.233 h7.62
  text "ASSEMBLY TOP" at -15.873,-10.004 h3.81
  text "A" at 396.001,-51.522 h7.62
  text "A" at -388.706,-51.649 h7.62
  text "APPROVALS" at 188.135,-55.029 h2.03
  text "DATE" at 231.195,-55.029 h2.03
  text "UNLESS OTHERWISE" at 132.187,-57.029 h2.54
  text "DESIGNER" at 171.443,-61.029 h2.03
  text "SPECIFIED" at 139.299,-62.029 h2.54
  text "DIMENSIONS ARE" at 134.219,-67.029 h2.54
  text "F. PRICE" at 175.443,-67.029 h2.54
  text "09/07/2016" at 225.283,-67.029 h2.54
  text "1511 Sixth Ave. Suite 300, Seattle, WA 98101 206.381.0898" at 262.531,-68.029 h2.54
  text "IN MILLIMETERS" at 134.219,-72.029 h2.54
  text "ENGINEER" at 171.443,-74.029 h2.03
  text "PRINTED CIRCUIT BOARD ASSEMBLY" at 275.223,-76.529 h3.81
  text "PROPRIETARY" at 83.679,-77.029 h3.81
  text "D. BRUEY /  N. WILDING" at 175.443,-80.029 h2.54
  text "TOLERANCES:" at 138.267,-82.029 h2.54
  text "AND" at 95.871,-83.029 h3.81
  text ".Board_Name" at 286,-84.975 h5.08
  text "MECH ENG" at 171.443,-87.029 h2.03
  text ".XX" at 136.947,-89.029 h2.29
  text "0.25" at 150.443,-89.029 h2.29
  text "CONFIDENTIAL" at 82.155,-89.529 h3.81
  text "SIZE" at 254.595,-91.029 h1.78
  text "DWG NO" at 265.443,-91.029 h1.78
  text "REV" at 373.307,-91.029 h1.78
  text "R. NICOLI" at 175.443,-93.029 h2.54
  text "THE INFORMATION CONTAINED IN" at 84.169,-93.779 h1.52
  text ".XXX" at 135.115,-96.029 h2.29
  text "0.127" at 150.443,-96.029 h2.29
  text "THIS DRAWING IS PROPRIETARY AND" at 82.345,-96.529 h1.52
  text "RESTRICTED. ANY REPRODUCTION" at 84.169,-99.279 h1.52
  text "600-" at 281.198,-100.73 h7.62
  text ".Board_Number" at 310.898,-100.83 h7.62
  text "D" at 254.395,-101.029 h7.62
  text ".PCB_Revision" at 368.839,-101.537 h7.62
  text "IN PART OR WHOLE WITHOUT THE" at 84.169,-102.029 h1.52
  text "ANGLES" at 137.451,-103.029 h2.29
  text "5" at 156.443,-103.029 h2.29
  text "EXPRESS WRITTEN PERMISSION" at 85.135,-104.779 h1.52
  text "OF THE OWNER IS PROHIBITED" at 85.135,-107.529 h1.52
  text "SCALE:4:1" at 256.035,-108.029 h1.78
  text "SHEET 3 OF 4" at 366.899,-108.029 h1.78
  text "1" at 334.483,-120.077 h7.62
  text "6" at -216.977,-120.229 h7.62
  text "5" at -106.538,-120.229 h7.62
  text "4" at 2.911,-120.508 h7.62
  text "3" at 113.731,-120.534 h7.62
  text "2" at 224.17,-120.534 h7.62
  text "7" at -327.086,-121.093 h7.62
ASY_DWG_R:
  lines w0.3: -379.557,-104.029 -238.557,-104.029 ; -379.557,-70.029 -238.557,-70.029 ; -378.557,-88.029 -238.557,-88.029 ; -347.557,-104.029 -347.557,-88.029 ; -251.557,-104.029 -251.557,-88.029 ; -238.557,-110.029 -238.557,-50.029
  lines w0.508: -159.579,391.175 -159.579,404.129 ; -159.579,391.175 -159.579,404.129 ; -159.579,391.175 -159.579,404.129 ; -399.101,14.62 -379.797,14.62 -399.101,14.62 ; -399.101,15.077 -379.797,15.077 -399.101,15.077 ; -399.101,140.045 -379.797,140.045 -399.101,140.045 ; -399.101,140.502 -379.797,140.502 -399.101,140.502 ; -399.101,265.47 -379.797,265.47 -399.101,265.47 ; -399.101,265.927 -379.797,265.927 -399.101,265.927 ; -269.815,-123.48 -269.815,-110.526 -269.815,-123.48 ; -269.79,391.175 -269.79,404.129 -269.79,391.175 ; -269.358,-123.48 -269.358,-110.526 -269.358,-123.48 ; -269.333,391.429 -269.333,404.129 -269.333,391.429 ; -159.122,391.175 -159.122,404.129 -159.122,391.175 ; -49.369,391.175 -49.369,404.129 -49.369,391.175 ; -48.912,391.175 -48.912,404.129 -48.912,391.175 ; 60.893,-123.48 60.893,-110.526 60.893,-123.48 ; 60.893,391.175 60.893,404.129 60.893,391.175 ; 61.35,-123.48 61.35,-110.526 61.35,-123.48 ; 61.35,391.175 61.35,404.129 61.35,391.175 ; 171.129,-123.48 171.129,-110.526 171.129,-123.48 ; 171.129,391.175 171.129,404.129 171.129,391.175 ; 171.586,-123.48 171.586,-110.526 171.586,-123.48 ; 171.586,391.175 171.586,404.129 171.586,391.175 ; 281.339,-123.48 281.339,-110.526 281.339,-123.48 ; 281.339,391.175 281.339,404.129 281.339,391.175 ; 281.796,-123.48 281.796,-110.526 281.796,-123.48 ; 281.796,391.175 281.796,404.129 281.796,391.175 ; 391.728,14.62 411.032,14.62 391.728,14.62 ; 391.728,15.077 411.032,15.077 391.728,15.077 ; 391.728,140.019 411.032,140.019 391.728,140.019 ; 391.728,140.477 411.032,140.477 391.728,140.477 ; 391.728,265.419 411.032,265.419 391.728,265.419 ; 391.728,265.876 411.032,265.876 391.728,265.876
  lines w1: -379.557,-110.029 391.443,-110.029 391.443,390.971 -379.557,390.971 -379.557,-110.029
  lines w1.1: -158.557,-123.029 -158.557,-110.029 ; -49.557,-123.029 -49.557,-110.029
  text "1" at -322.393,394.959 h7.62
  text "6" at 228.939,394.781 h7.62
  text "5" at 118.347,394.705 h7.62
  text "7" at 338.87,394.654 h7.62
  text "2" at -212.056,394.553 h7.62
  text "3" at -102.023,394.553 h7.62
  text "4" at 8.746,394.553 h7.62
  text "NOTES: UNLESS OTHERWISE SPECIFIED" at 379.318,378.871 h2.03
  text "1   RoHS COMPLIANT ASSEMBLY REQUIRED. ASSEMBLE PER IPC-A-610, CLASS 2," at 379.218,372.371 h2.03
  text "2   AQUEOUS BASED CLEANING AFTER SOLDER FOR ALL COMPONENTS IS PREFERRED, NO-CLEAN" at 379.124,367.166 h2.03
  text "RoHS SOLDER PROCESS IS ACCEPTABLE." at 379.268,363.021 h2.03
  text "3   ITEM IDENTIFICATION: MARK REVISION NUMBER OF THIS DRAWING IN THE SPACE PROVIDED." at 379.443,357.221 h2.03
  text "D" at -384.242,325.287 h7.62
  text "D" at 400.44,325.135 h7.62
  text "C" at -384.242,199.836 h7.62
  text "C" at 400.567,199.633 h7.62
  text "B" at -384.369,74.233 h7.62
  text "B" at 400.338,74.233 h7.62
  text "ASSEMBLY BOTTOM" at 29.127,-10.004 h3.81
  text "A" at -384.115,-51.522 h7.62
  text "A" at 400.592,-51.649 h7.62
  text "1511 Sixth Ave. Suite 300, Seattle, WA 98101 206.381.0898" at -250.645,-68.029 h2.54
  text "PRINTED CIRCUIT BOARD ASSEMBLY" at -263.337,-76.529 h3.81
  text ".Board_Name" at -277.241,-84.804 h5.08
  text "REV" at -361.421,-91.029 h1.78
  text "DWG NO" at -253.557,-91.029 h1.78
  text "SIZE" at -242.709,-91.029 h1.78
  text "600-" at -269.312,-100.73 h7.62
  text ".Board_Number" at -299.012,-100.83 h7.62
  text "D" at -242.509,-101.029 h7.62
  text ".PCB_Revision" at -357.846,-101.55 h7.62
  text "SHEET 4 OF 4" at -355.013,-108.029 h1.78
  text "SCALE:4:1" at -244.149,-108.029 h1.78
  text "1" at -322.597,-120.077 h7.62
  text "5" at 118.424,-120.229 h7.62
  text "6" at 228.863,-120.229 h7.62
  text "4" at 8.975,-120.508 h7.62
  text "2" at -212.284,-120.534 h7.62
  text "3" at -101.845,-120.534 h7.62
  text "7" at 338.972,-121.093 h7.62
TITLEBLOCK:
  lines w0.25: -57.457,-48.529 63.543,-48.529 ; 1.043,-29.529 63.543,-29.529 63.543,-58.029 -57.457,-58.029 -57.457,-36.029 63.543,-36.029 ; 19.043,-58.029 19.043,-29.529 ; 19.043,-41.029 63.543,-41.029 ; 52.543,-48.529 52.543,-41.029
  text "PRODUCT" at 5.287,-32.029 h1.52
  text "1511 SIXTH AVENUE, THIRD FLOOR" at 20.043,-32.029 h1.52
  text "DEVELOPMENT" at 3.355,-35.029 h1.52
  text "SEATTLE,WA 98101  206.381.0898" at 20.043,-35.029 h1.52
  text "DATE" at 20.043,-38.029 h1.02
  text "09/07/2016" at 32.923,-39.529 h2.03
  text "PRINTED CIRCUIT BOARD" at -38.693,-40.529 h2.29
  text "PART NUMBER" at 20.043,-43.029 h1.02
  text "REV" at 56.819,-43.029 h1.02
  text ".Board_Name" at -47.821,-46.675 h3.81
  text "601-" at 25.698,-46.73 h2.54
  text ".Board_Number" at 35.998,-46.73 h2.54
  text ".PCB_Revision" at 55.843,-47.197 h2.54
  text "PROPRIETARY AND CONFIDENTIAL" at 24.269,-51.529 h1.52
  text "THE INFORMATION CONTAINED IN THIS DRAWING IS PROPRIETARY AND" at 23.053,-53.529 h0.76
  text "RESTRICTED. ANY REPRODUCTION IN PART OR WHOLE WITHOUT THE" at 23.965,-55.029 h0.76
  text "EXPRESS WRITTEN PERMISSION OF THE OWNER IS PROHIBITED" at 24.681,-56.529 h0.76
Drill Drawing:
  lines w0.254: 91.163,-1.132 92.01,-0.709 92.857,-1.132 92.433,-0.285 92.857,0.561 92.01,0.138 91.163,0.561 91.587,-0.285 91.163,-1.132 ; 91.163,2.678 92.857,2.678 92.857,4.371 91.163,4.371 91.163,2.678
  lines w0.381: 89.645,-2.275 358.15,-2.275 ; 89.645,5.345 358.15,5.345 ; 103.637,-6.085 103.637,9.155 ; 117.349,-6.085 117.349,9.155 ; 145.027,-6.085 145.027,9.155 ; 157.877,-6.085 157.877,9.155 ; 176.515,-6.085 176.515,9.155 ; 214.604,-6.085 214.604,9.155 ; 229.586,-6.085 229.586,9.155 ; 248.529,-6.085 248.529,9.155 ; 267.574,-6.085 267.574,9.155 ; 289.259,-6.085 289.259,9.155 ; 323.133,-6.085 323.133,9.155 ; 89.645,-6.085 358.15,-6.085 358.15,9.155 89.645,9.155 89.645,-6.085
  text "Symbol" at 91.931,6.488 h1.83
  text "Count" at 104.78,6.488 h1.83
  text "Hole Size" at 118.492,6.488 h1.83
  text "Plated" at 146.17,6.488 h1.83
  text "Hole Type" at 159.02,6.488 h1.83
  text "Drill Layer Pair" at 177.658,6.488 h1.83
  text "Via/Pad" at 215.747,6.488 h1.83
  text "Pad Shape" at 230.729,6.488 h1.83
  text "Template" at 249.672,6.488 h1.83
  text "Description" at 268.717,6.488 h1.83
  text "Hole Tolerance (+)" at 290.402,6.488 h1.83
  text "Hole Tolerance (-)" at 324.276,6.488 h1.83
  text "12" at 104.78,2.678 h1.52
  text "0.500mm (19.69mil)" at 118.492,2.678 h1.52
  text "NPTH" at 146.17,2.678 h1.52
  text "Round" at 159.02,2.678 h1.52
  text "Top Layer - Bottom Layer" at 177.658,2.678 h1.52
  text "Pad" at 215.747,2.678 h1.52
  text "Rounded" at 230.729,2.678 h1.52
  text "c0hn50m55" at 249.672,2.678 h1.52
  text "13" at 104.78,-1.132 h1.52
  text "0.200mm (7.87mil)" at 118.492,-1.132 h1.52
  text "PTH" at 146.17,-1.132 h1.52
  text "Round" at 159.02,-1.132 h1.52
  text "Top Layer - Bottom Layer" at 177.658,-1.132 h1.52
  text "Via" at 215.747,-1.132 h1.52
  text "Rounded" at 230.729,-1.132 h1.52
  text "v40h20m0mx0" at 249.672,-1.132 h1.52
  text "25 Total" at 104.78,-4.942 h1.52
  text ".Layer_Name" at -10.346,-9.7 h3.81

## Text inside footprints (layer, text, board x,y; h text height)
D1: 3D_TOP "C" at 3.55,2.7 h0.6; 3D_TOP "A" at 6.85,2.7 h0.6